# Altium PCB PCB1.PcbDoc
Units mil, origin at the board's own origin, x right, y up, seen from the top; angles counter-clockwise.
Board outline 1985 x 950 mil, 2 copper layers (Top Layer, Bottom Layer); 27 components, 18 nets, 88 pads, 16 vias.
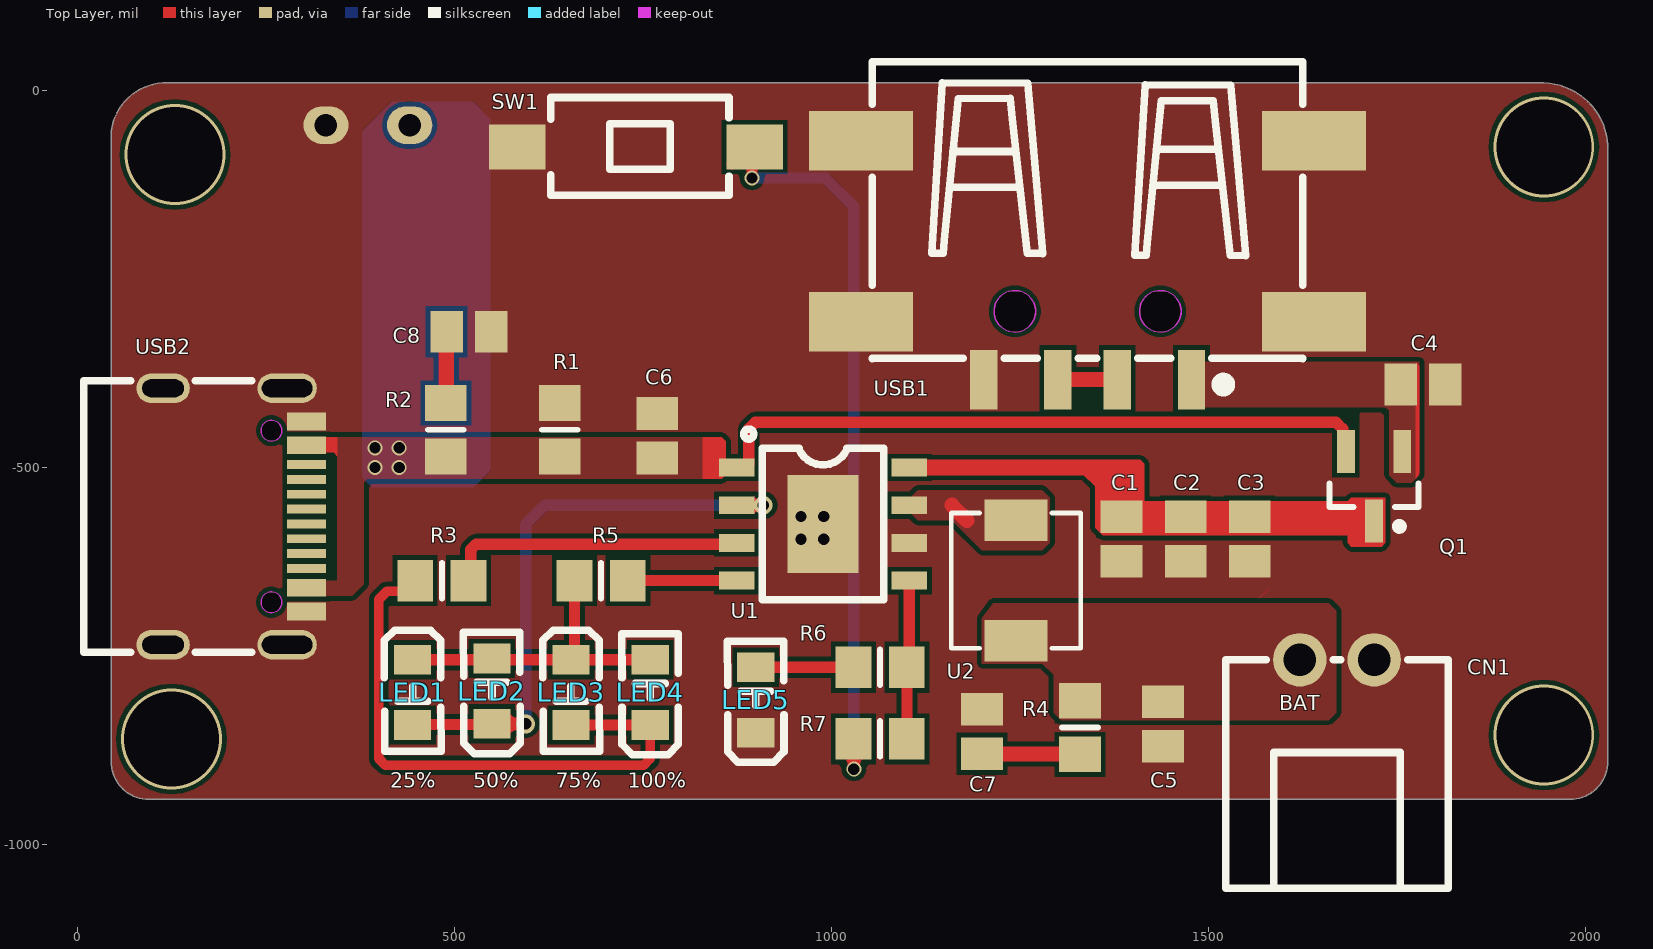
[diagram p0: Top Layer view]
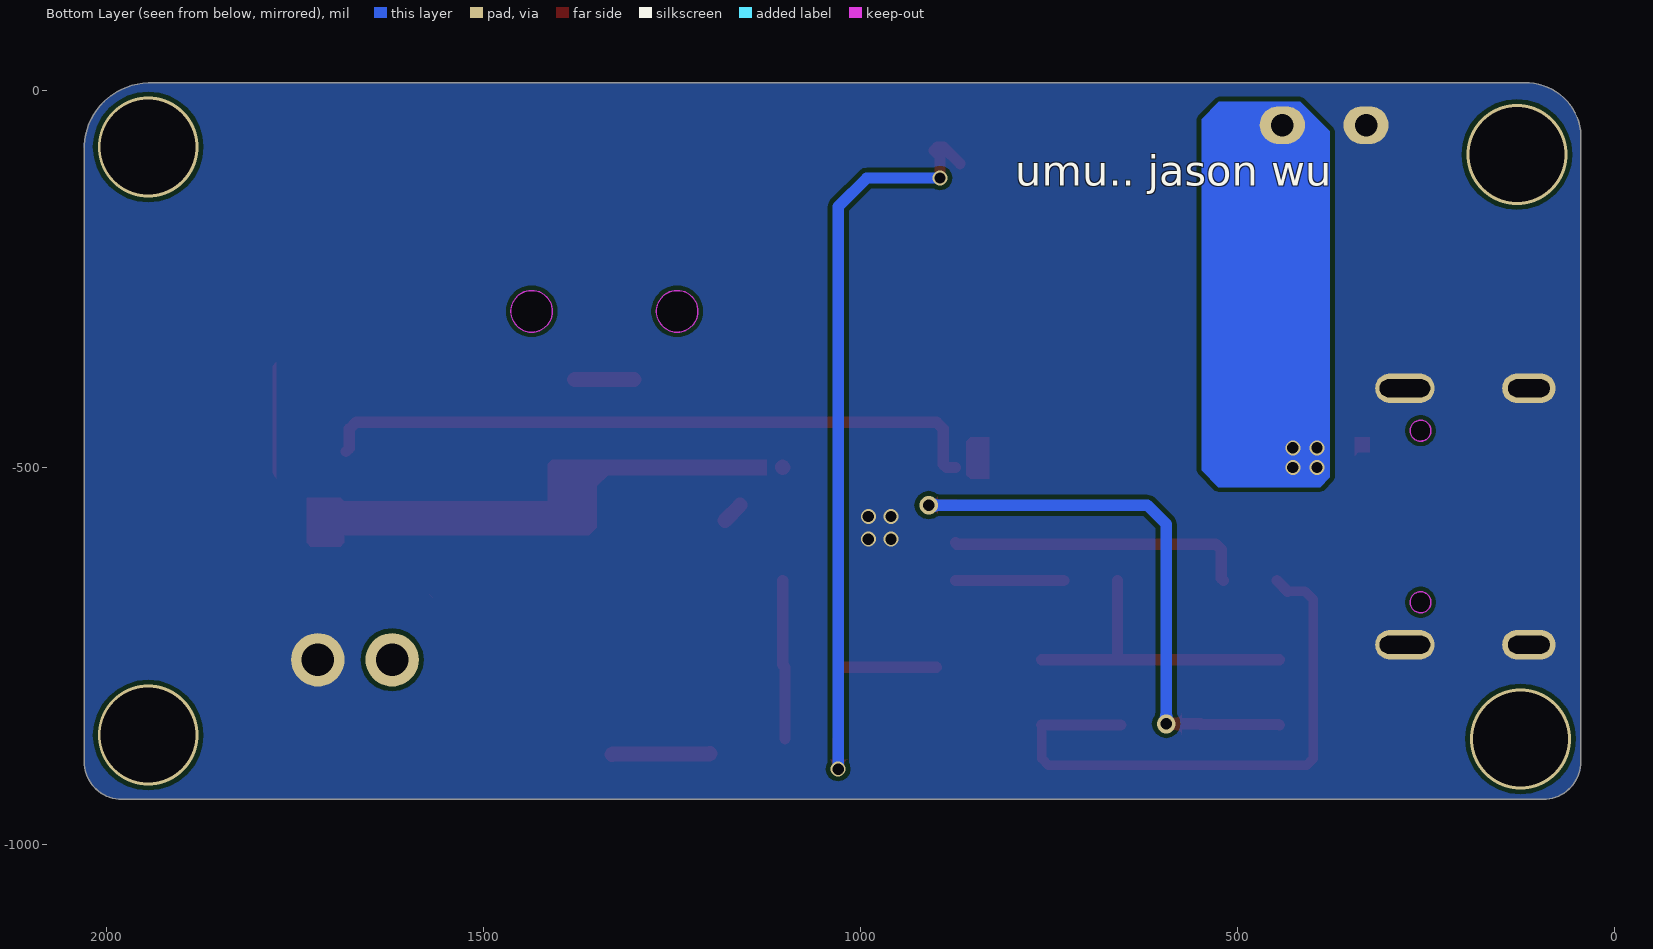
[diagram p1: Bottom Layer view, seen from below]

## Layer stack, top to bottom
Top Solder: solder mask 0.4, Solder Resist, Dk 3.5
Top Layer: signal copper 1.4
Dielectric 1: dielectric 12.6, FR-4, Dk 4.8
Bottom Layer: signal copper 1.4
Bottom Solder: solder mask 0.4, Solder Resist, Dk 3.5

## Board outline
95,-940 cw(c95,-890) 45,-890 45,-60 cw(c117.5,-62.5) 120,10 1945,10 cw(c1942.5,-77.5) 2030,-80 2030,-890 cw(c1980,-890) 1980,-940

## Design rules (kind name [scope] priority, off if disabled: settings)
Clearance [All] p1: gap=6 ignorepadtopadclearanceinfootprint=FALSE
HoleSize [All] p1: absolutevalues=TRUE maxlimit=200 minlimit=1 maxpercent=80.000 minpercent=20.000
MinimumSolderMaskSliver [All] p1: minsoldermaskwidth=3.5
PlaneConnect [All] p1: planeconnectstyle=Direct reliefexpansion=20 reliefentries=4 reliefconductorwidth=10 reliefairgap=10
PolygonConnect [All] p1: connectstyle=Direct reliefconductorwidth=10 reliefentries=4 polygonreliefangle="90 Angle" airgapwidth=10
RoutingVias [All] p1: holewidth=28 width=50 viastyle="Through Hole" minholewidth=28 minwidth=50 maxholewidth=28 maxwidth=50
SilkToSolderMaskClearance [IsPad] p1: minsilkscreentomaskgap=2.99 clearancetoexposedcopper=TRUE
SolderMaskExpansion [All] p1: expansion=4 istentingtop=FALSE
Width [All] p1: maxlimit=50 minlimit=10 preferedwidth=10 minimp=50.000000 maximp=50.000000 favimp=50.000000
26 further rules are at their usual default settings.

## Components (designator, comment, footprint, x,y, rotation, side; value= is the part's Value field where it differs from the comment)
C1 "Capacitor_Patch" C0805 1385,-595 r270 top value=10uF
C2 "Capacitor_Patch" C0805 1470,-595 r270 top value=10uF
C3 "Capacitor_Patch" C0805 1555,-595 r270 top value=10uF
C4 "Capacitor_Patch" C0805 1785,-390 r0 top value=10uF
C5 "Capacitor_Patch" C0805 1440,-840 r90 top value=10uF
C6 "Capacitor_Patch" C0805 769.06,-457.87 r270 top value=10uF
C7 "Capacitor_Patch" C0805 1200,-850 r270 top value=10uF
C8 "Capacitor_Patch" C0805 519.53,-320 r180 top value=10uF
CN1 "HX25003-2WAP" CONN-TH_2P-P2.50_HX25003-2WAP 1670.79,-755 r0 top
LED1 "LED_Patch" PCBComponent_1 462.59,-280.63 r270 top
LED2 "LED_Patch" PCBComponent_1 532.41,-1314.37 r90 top
LED3 "LED_Patch" PCBComponent_1 672.59,-280.63 r270 top
LED4 "LED_Patch" PCBComponent_1 742.41,-1315.99 r90 top
LED5 "LED_Patch" PCBComponent_1 882.41,-1325.99 r90 top
Q1 "MOSFET-P" SOT23_M 1720,-525 r270 top
R1 "Res" 6-0805_N 640,-450 r270 top
R2 "Res" 6-0805_N 489.06,-450 r90 top
R3 "Res" 6-0805_N 483.62,-650 r0 top
R4 "Res" 6-0805_N 1330,-845 r270 top
R5 "Res" 6-0805_N 695,-650 r0 top
R6 "Res" 6-0805_N 1065,-765 r180 top
R7 "Res" 6-0805_N 1065,-860 r180 top
SW1 "TS-1101-C-W" SW-SMD_L6.0-W3.3-LS8.0 741,-75 r180 top
U1 "IP5306" ESOP-8_L4.9-W3.9-P1.27-LS6.0-BL-EP 989.06,-575 r270 top locked
U2 "1uH" IND-SMD_L4.4-W4.2 1245,-650 r90 top
USB1 "10.0 QTJ6.3" USB-A-SMD_10.0-QTJ6.3 1340,-225 r180 top
USB2 "KH-TYPE-C-16P" USB-C-SMD_KH-TYPE-C-16P 209.06,-565 r270 top

## Footprints (in the part's own frame and the unit in brackets; to place one, negate y for a bottom-side part, rotate by r counter-clockwise, add the part's x,y. Pads: shape width x height; smd on the part's side, far side on the other; paste and mask are expansions set on the pad)
6-0805_N [mm] "Chip Resistor, Body 2.0x1.2mm, IPC Medium Density"
  rect 1.2x1.4 smd: 1(-0.9,0) 2(0.9,0)
  silkscreen extent 0,-0.6 0,0.6, body extent -1.07,-0.7 1.07,0.7, height 0.7
C0805 [mm] "Chip Capacitor, Body 2.0x1.3mm, IPC High Density"
  rect 1.1x1.4 smd: 1(-0.75,0) 2(0.75,0)
  body extent -1.1,-0.72 1.1,0.72, height 1.4
CONN-TH_2P-P2.50_HX25003-2WAP [mm]
  round 1.8 hole 1.1: 1(-1.25,0) 2(1.25,0)
  silkscreen extent -3.75,-7.7 3.75,0
ESOP-8_L4.9-W3.9-P1.27-LS6.0-BL-EP [mm]
  rect 0.6x1.2 smd: 1(-1.905,-2.908) 2(-0.635,-2.908) 3(0.635,-2.908) 4(1.905,-2.908) 5(1.905,2.908) 6(0.635,2.908) 7(-0.635,2.908) 8(-1.905,2.908)
  rect 3.3x2.4 smd: 9(0,0)
  silkscreen extent -3.2,-2.67 2.55,2.05
IND-SMD_L4.4-W4.2 [mm]
  rect 1.4x2.12 smd: 1(2.028,0) 2(-2.028,0)
  silkscreen extent -2.28,-2.18 2.28,2.18
PCBComponent_1 [mm]
  rect 1x1.25 smd: 1(12.049,-0.447) 2(14.249,-0.447)
  silkscreen extent 11.05,-1.4 15.13,0.51
SOT23_M [mm] "SOT23, 3-Leads, Body 2.9x1.3mm, Pitch 0.95mm, Lead Span 2.3mm - Reverse Pinning, IPC Low Density"
  rect 1.45x0.6 smd: 1(1.175,0) 2(-1.175,-0.95) 3(-1.175,0.95)
  silkscreen extent -0.1,-1.5 1.47,1.5, body extent -0.7,-1.5 0.7,1.5, height 1.1
SW-SMD_L6.0-W3.3-LS8.0 [mm]
  rect 1.9x1.5 smd: 1(-4,0) 2(4,0)
  silkscreen extent -3.14,-1.67 2.86,1.63
USB-A-SMD_10.0-QTJ6.3 [mm]
  rect 0.92x2 smd: 1(-3.5,4.025) 2(-1,4.025) 3(1,4.025) 4(3.5,4.025)
  rect 3.5x2 smd: 5(7.625,2.075) 6(7.625,-4.025) 7(-7.625,-4.025) 8(-7.625,2.075)
  Keep-Out Layer board cut-out: -1.75,1.724 -1.75,1.632 -1.798,1.454 -1.89,1.294 -2.02,1.164 -2.18,1.072 -2.358,1.024 -2.542,1.024 -2.72,1.072 -2.88,1.164 -3.01,1.294 -3.102,1.454 -3.15,1.632 -3.15,1.724 -3.15,1.816 -3.102,1.994 -3.01,2.154 -2.88,2.284 -2.72,2.376 -2.542,2.424 -2.358,2.424 -2.18,2.376 -2.02,2.284 -1.89,2.154 -1.798,1.994 -1.75,1.816 -1.75,1.724 -1.75,1.724
  Keep-Out Layer board cut-out: 3.15,1.724 3.15,1.632 3.102,1.454 3.01,1.294 2.88,1.164 2.72,1.072 2.542,1.024 2.358,1.024 2.18,1.072 2.02,1.164 1.89,1.294 1.798,1.454 1.75,1.632 1.75,1.724 1.75,1.816 1.798,1.994 1.89,2.154 2.02,2.284 2.18,2.376 2.358,2.424 2.542,2.424 2.72,2.376 2.88,2.284 3.01,2.154 3.102,1.994 3.15,1.816 3.15,1.724 3.15,1.724
  Keep-Out Layer circle w0.025: c-2.45,1.724 r0.7
  Keep-Out Layer circle w0.025: c2.45,1.724 r0.7
  Keep-Out Layer region: -1.75,1.724 -1.75,1.632 -1.798,1.454 -1.89,1.294 -2.02,1.164 -2.18,1.072 -2.358,1.024 -2.542,1.024 -2.72,1.072 -2.88,1.164 -3.01,1.294 -3.102,1.454 -3.15,1.632 -3.15,1.724 -3.15,1.816 -3.102,1.994 -3.01,2.154 -2.88,2.284 -2.72,2.376 -2.542,2.424 -2.358,2.424 -2.18,2.376 -2.02,2.284 -1.89,2.154 -1.798,1.994 -1.75,1.816 -1.75,1.724 -1.75,1.724
  Keep-Out Layer region: 3.15,1.724 3.15,1.632 3.102,1.454 3.01,1.294 2.88,1.164 2.72,1.072 2.542,1.024 2.358,1.024 2.18,1.072 2.02,1.164 1.89,1.294 1.798,1.454 1.75,1.632 1.75,1.724 1.75,1.816 1.798,1.994 1.89,2.154 2.02,2.284 2.18,2.376 2.358,2.424 2.542,2.424 2.72,2.376 2.88,2.284 3.01,2.154 3.102,1.994 3.15,1.816 3.15,1.724 3.15,1.724
  silkscreen extent -7.25,-6.67 7.25,4.39
USB-C-SMD_KH-TYPE-C-16P [mm]
  oval 1x2 hole 0.6 slot 1.7 at 90 deg: 1(-4.32,1.765) 2(4.32,1.765)
  oval 1x1.8 hole 0.6 slot 1.4 at 90 deg: 3(-4.32,-2.415) 4(4.32,-2.415)
  rect 0.3x1.3 smd paste-100 mask+0.05: A1(-3.35,2.415) A4(-2.55,2.415) A5(-1.25,2.415) A6(-0.25,2.415) A7(0.25,2.415) A8(1.25,2.415) A9(2.55,2.415) A12(3.35,2.415) B1(3.05,2.415) B4(2.25,2.415) B5(1.75,2.415) B6(0.75,2.415) B7(-0.75,2.415) B8(-1.75,2.415) B9(-2.25,2.415) B12(-3.05,2.415)
  Keep-Out Layer board cut-out: -2.54,1.235 -2.54,1.165 -2.593,1.037 -2.692,0.938 -2.82,0.885 -2.96,0.885 -3.088,0.938 -3.187,1.037 -3.24,1.165 -3.24,1.235 -3.24,1.305 -3.187,1.433 -3.088,1.532 -2.96,1.585 -2.82,1.585 -2.692,1.532 -2.593,1.433 -2.54,1.305 -2.54,1.235 -2.54,1.235
  Keep-Out Layer board cut-out: 3.24,1.235 3.24,1.165 3.187,1.037 3.088,0.938 2.96,0.885 2.82,0.885 2.692,0.938 2.593,1.037 2.54,1.165 2.54,1.235 2.54,1.305 2.593,1.433 2.692,1.532 2.82,1.585 2.96,1.585 3.088,1.532 3.187,1.433 3.24,1.305 3.24,1.235 3.24,1.235
  Keep-Out Layer circle w0.025: c-2.89,1.235 r0.35
  Keep-Out Layer circle w0.025: c2.89,1.235 r0.35
  Keep-Out Layer region: -2.54,1.235 -2.54,1.165 -2.593,1.037 -2.692,0.938 -2.82,0.885 -2.96,0.885 -3.088,0.938 -3.187,1.037 -3.24,1.165 -3.24,1.235 -3.24,1.305 -3.187,1.433 -3.088,1.532 -2.96,1.585 -2.82,1.585 -2.692,1.532 -2.593,1.433 -2.54,1.305 -2.54,1.235 -2.54,1.235
  Keep-Out Layer region: 3.24,1.235 3.24,1.165 3.187,1.037 3.088,0.938 2.96,0.885 2.82,0.885 2.692,0.938 2.593,1.037 2.54,1.165 2.54,1.235 2.54,1.305 2.593,1.433 2.692,1.532 2.82,1.585 2.96,1.585 3.088,1.532 3.187,1.433 3.24,1.305 3.24,1.235 3.24,1.235
  silkscreen extent -4.57,-5.08 4.57,0.57

## Part data
C1 C2 C3 C4 C5 C6 C7 C8: "0805", JLCPCB Part Class="Basic Part", LCSC Part Name="10uF ±10% 25V", Manufacturer=SAMSUNG(三星), Manufacturer Part=CL21A106KAYNNNE, Temperature Coefficient=X5R, Tolerance=±10%, Voltage Rated=25V, Add into BOM=yes, Convert to PCB=yes, Datasheet=https://atta.szlcsc.com/upload/public/pdf/source/20160218/1457707763339.pdf, Device=CL21A106KAYNNNE_C15850, Supplier=LCSC, Supplier Footprint=0805, Supplier Part=C15850, Symbol=CL21A106KAYNNNE
CN1: Current Rating (Max)=-, JLCPCB Part Class="Extended Part", LCSC Part Name="1x2P 间距:2.5mm 弯插 系列:XH", Manufacturer=HX(红星), Add into BOM=yes, Convert to PCB=yes, Datasheet=https://atta.szlcsc.com/upload/public/pdf/source/20191028/C442341_CB026E8ECE589085FA4A025D9CD8B44B.pdf, Device=HX25003-2WAP, Manufacturer Part=HX25003-2WAP, Mounting Style=弯插, Number of Pins=2P, Number of PINs Per Row=2, Number of Rows=1, Operating Temperature Range=-, Pins Structure=1x2P, Pitch=2.5mm, Reference Series=XH, Row Spacing=-, Supplier=LCSC, Supplier Footprint=弯插,P=2.5mm, Supplier Part=C442326, Symbol=HX25003-2WAP
LED1 LED2 LED3 LED4 LED5: "0805", Color Temperature=-, Forward Current=20mA, Illumination Color=翠绿色, JLCPCB Part Class="Extended Part", LCSC Part Name=XL-2012UGC, Lens Color=无色透明透镜, Manufacturer=XINGLIGHT(成兴光), Operating Temperature=-20℃~+85℃, Power(Watts)=70mW, Voltage - Forward(Vf)=3.2V, Add into BOM=yes, Convert to PCB=yes, Datasheet=https://atta.szlcsc.com/upload/public/pdf/source/20250225/603248BA8F596867ADF5B11D7DFBCB79.pdf, Device=XL-2012UGC, Luminous Intensity=750mcd, Manufacturer Part=XL-2012UGC, Mounting Sytle=正贴, Peak Wavelength=525nm, Supplier=LCSC, Supplier Footprint=0805, Supplier Part=C965815, Symbol=XL-2012UGC, Viewing Angle=120°, Wavelength - Dominant=515nm~535nm
Q1: "P-Channel MOSFET", LatestRevisionDate=17-Jul-2002, LatestRevisionNote="Re-released for DXP Platform.", PackageDescription="TO, Flat Index; 3 In-Line, Axial Leads; Body Dia. 4.6mm; Lead Dia. 0.5 mm (max)", PackageReference=E3, PackageVersion=1995/1996, Published=8-Jun-2000, Publisher="Altium Limited"
SW1: Actuator/Cap Color=白色带淡绿, Contact Current=50mA, Insulation Resistance=-, JLCPCB Part Class="Extended Part", LCSC Part Name="6*3.6*2.5mm 立贴 轻触开关", Manufacturer="XKB Connectivity(中国星坤)", Operating Force=260gf, Operating Temperature=-30℃~+85℃, Voltage Rating (DC)=12V, Actuator Style=矩形按钮, Add into BOM=yes, Circuit=单刀单掷, Convert to PCB=yes, Datasheet=https://atta.szlcsc.com/upload/public/pdf/source/20200227/C318938_C2E53B1EEDE37D980A33616AC086DE53.pdf, Device=TS-1101-C-W, IP Rating=-, Manufacturer Part=TS-1101-C-W, Mechanical Life=5万次, Mounting Style=立贴, Pin Style=-, Power Rating=-, Strike Gundam=不带, Supplier=LCSC, Supplier Footprint=SMD, Supplier Part=C318938, Switch Height=2.5mm, Switch Length=6mm, Switch Width=3.6mm, Symbol=TS-1101-C-W, Voltage Rating (AC)=-, With Lamp=无
U1: "IC"
U2: library part Inductor_SMD, Current - Saturation(Isat)=7A, Current Rating=6A, DC Resistance(DCR)=27mΩ, JLCPCB Part Class="Extended Part", LCSC Part Name="1uH ±20% 7A", Manufacturer=XR(祥如), Manufacturer Part=XR0420-1R0M, Tolerance=±20%, Add into BOM=yes, Convert to PCB=yes, Datasheet=https://atta.szlcsc.com/upload/public/pdf/source/20240328/238362994E593F0E82794C6287AEB16E.pdf, Device=XR0420-1R0M, Supplier=LCSC, Supplier Footprint=SMD,0420, Supplier Part=C5307587, Symbol=XR0420-1R0M, Type=一体成型电感
USB1: Core Colour=黑色, Current Rating - Power (Max)=1.5A, JLCPCB Part Class="Extended Part", LCSC Part Name="Type-A 母 卧贴", Manufacturer="SHOU HAN(首韩)", Operating Temperature Range=-25℃~+85℃, Rated Voltage (Max)=30V, Add into BOM=yes, Center Height=-, Connect-Disconnect Life=5千次, Connector Type=Type-A, Convert to PCB=yes, Datasheet=https://atta.szlcsc.com/upload/public/pdf/source/20241125/0CEA21D77C128715D5877707589FFAD8.pdf, Device="10.0 QTJ6.3", Gender=母, Length=10mm, Manufacturer Part="10.0 QTJ6.3", Mounting Style=卧贴, Number of Contacts=4P, Number of Ports=1, Standard="USB 2.0", Supplementary Features=-, Supplier=LCSC, Supplier Footprint=SMD, Supplier Part=C404966, Symbol="10.0 QTJ6.3"
USB2: Current Rating - Power (Max)=3A, JLCPCB Part Class="Extended Part", LCSC Part Name="Type-C 母 卧贴", Manufacturer=kinghelm(金航标), Operating Temperature Range=-40℃~+85℃, Add into BOM=yes, Connector Type=Type-C, Convert to PCB=yes, Datasheet=https://atta.szlcsc.com/upload/public/pdf/source/20200911/C709357_AA8DCEB38BB20E3035A7ED7AE7667837.pdf, Device=KH-TYPE-C-16P, Gender=母, Manufacturer Part=KH-TYPE-C-16P, Mounting Style=卧贴, Number of Contacts=16P, Number of Ports=1, Standard=-, Supplier=LCSC, Supplier Footprint=SMD, Supplier Part=C709357, Symbol=KH-TYPE-C-16P
R1 R2 R3 R4 R5 R6 R7: Code_IPC=RESC2012, LatestRevisionDate=29-May-2009, LatestRevisionNote="IPC-7351 Footprint Added.", PackageDescription="Chip Resistor 0805 Case Size", PackageReference=6-0805, PackageVersion=Mar-2003, Published=24-Mar-1999, Publisher="Altium Limited"

## Free pads (board coordinates)
  oval 60x50 hole 29.76: 2(330,-46) 3(441,-46)

## Via types
v1: diameter 20, hole 15, Top Layer to Bottom Layer, 10 vias
v2: diameter 133.86, hole 125.98, Top Layer to Bottom Layer, 4 vias
v3: diameter 25, hole 15, Top Layer to Bottom Layer, 2 vias

## Nets (pads, with @x,y where several pads share a name; then routed paths per layer and width w, separated by ;. In a path a pad name is that pad's centre, name@x,y a point inside that pad or via, vN(x,y) a via of type N, cw(c..) or ccw(c..) an arc to the next point about the centre after c; other vN are vias at no path point)
BAT: C5.2 CN1.1 R4.1 U2.2
GND: C1.2 C2.2 C3.2 C4.2 C5.1 C6.1 C7.1 C8.1 CN1.2 LED5.1 pad.2 R1.1 SW1.2 U1.6 U1.9 USB1.4 USB1.5 USB1.6 USB1.7 USB1.8 USB2.1 USB2.2 USB2.3 USB2.4 USB2.A1 USB2.A12 USB2.B1 USB2.B12
  other v1: 960,-595 990,-595 960,-565 990,-565
NetC1_1: C1.1 C2.1 C3.1 Q1.1 U1.8 | length 178.6
  Top Layer w15: C1.1 C2.1 C3.1 ; Q1.1@1715.69,-565.47 1720,-569.78 Q1.1
  Top Layer w20: U1.8 U1.8@1104.04,-499.51 ; C2.1@1470,-570.47 C2.1@1470.24,-570.24
NetC4_1: C4.1 Q1.3 USB1.1
NetC7_2: C7.2 R4.2 | length 130.4
  Top Layer w20: C7.2 1200.45,-879.98 1329.55,-879.98 R4.2
NetC8_2: C8.2 R2.2 | length 95
  Top Layer w20: R2.2 489.53,-414.09 489.53,-320.47 C8.2
NetLED1_1: LED1.1 LED2.2 LED3.1 LED4.2 R5.1 | length 421.9
  Top Layer w15: LED1.1 LED3.1 ; R5.1 659.57,-750.43 LED3.1 ; LED4.2 LED3.1
NetLED1_2: LED1.2 LED2.1 U1.2 | length 776.5
  Top Layer w15: LED1.2 445.81,-840.81 549.19,-840.81 LED2.1 v3(595,-840) ; U1.2 v3(910,-550)
  Bottom Layer w15: v3(595,-840) 595,-575 620,-550 v3(910,-550)
NetLED3_2: LED3.2 LED4.1 R3.1 | length 786.6
  Top Layer w13: R3.1@434.04,-664.15 410.85,-664.15 400,-675 400,-886.21 408.79,-895 751.21,-895 760,-886.21 LED4.1
  Top Layer w15: R3.1@434.04,-664.15 R3.1 ; LED3.2 LED4.1
NetLED5_2: LED5.2 R6.2 | length 129.6
  Top Layer w15: LED5.2 R6.2
NetR3_2: R3.2 U1.3 | length 398.6
  Top Layer w15: R3.2 522.06,-646.99 522.06,-608.73 529.11,-601.68 872.88,-601.68 U1.3
NetR5_2: R5.2 U1.4 | length 144.1
  Top Layer w15: R5.2 U1.4
NetR6_1: R6.1 R7.1 U1.5 | length 211.3
  Top Layer w15: R7.1 R6.1 1103.56,-761.88 U1.5
NetR7_2: R7.2 SW1.1 | length 1022.1
  Top Layer w15: SW1.1@868.58,-97.03 890.61,-75 SW1.1 903,-79.52 895,-87.52 v1(895,-116) ; R7.2 1030,-860.43 v1(1030,-900)
  Bottom Layer w15: v1(895,-116) 992,-116 1030,-154 v1(1030,-900)
NetU1_7: U1.7 U2.1 | length 28.5
  Top Layer w20: 1160,-550 1180.16,-570.16
NetUSB1_2: USB1.2 USB1.3 | length 78.7
  Top Layer w20: USB1.3 USB1.2
NetUSB2_A4: 
VIN: C6.2 pad.3 Q1.2 R1.2 R2.1 U1.1 USB2.A4 USB2.A9 USB2.B4 USB2.B9 | length 891.4
  Top Layer w15: U1.1 886.37,-500 890.68,-495.69 890.68,-448.79 899.46,-440 1669.5,-440 1678.29,-448.79 1678.29,-474.43 Q1.2
  other v1: 395,-500 427,-500 395,-474 427,-474
pads on no net: USB2.A5 USB2.A6 USB2.A7 USB2.A8 USB2.B5 USB2.B6 USB2.B7 USB2.B8
copper on no net:
  other v2: 125,-860 1945,-855 130,-85 1945,-75

## Polygon pours and split planes (outlines as drawn)
GND on Top Layer "Top Layer-No Net" (solid, pour order 33): 95,-940 cw(c95,-890) 45,-890 45,-60 cw(c117.5,-62.5) 120,10 1945,10 cw(c1942.5,-77.5) 2030,-80 2030,-890 cw(c1980,-890) 1980,-940
NetC4_1 on Top Layer "NETC4_1_L01_P030" (solid, pour order 30): 1750,-520 1770,-520 1780,-510 1780,-360 1460,-360 1460,-420 1735,-420 1740,-425 1740,-510
BAT on Top Layer "BAT_L01_P027" (solid, pour order 27): 1640,-680 1660,-680 1670,-690 1670,-825 1660,-835 1640,-835
BAT on Top Layer "BAT_L01_P025" (solid, pour order 25): 1200,-760 1280,-760 1295,-775 1295,-825 1305,-835 1640,-835 1640,-680 1570,-680 1215,-680 1200,-700
VIN on Top Layer "VIN_L01_P021" (solid, pour order 21): 310,-670 365,-670 380,-655 380,-520 385,-515 395,-515 830,-515 830,-460 345,-460 345,-650 310,-650
NetU1_7 on Top Layer "NETU1_7_L01_P018" (solid, remove dead copper, pour order 18): 1105,-540 1115,-530 1280,-530 1290,-540 1290,-600 1280,-610 1200,-610 1160,-570 1115,-570 1105,-560
GND on Bottom Layer "Top Layer-No Net1" (solid, pour order 34): 95,-940 cw(c95,-890) 45,-890 45,-60 cw(c117.5,-62.5) 120,10 1945,10 cw(c1942.5,-77.5) 2030,-80 2030,-890 cw(c1980,-890) 1980,-940

## Other copper
Top Layer:
  pour cut-out: 1700.41,-444.2 1700.41,-428.59 1702.51,-426.49 1682.27,-426.49 1682.27,-426.52 1680.46,-428.33 1680.46,-433.52 1691.14,-444.2
  pour cut-out: 1682.27,-426.49
  pour cut-out: 1700.41,-444.2
  region net NetC1_1: 1685,-545 1690,-540 1735,-540 1735,-600 1730,-605 1690,-605 1685,-600
  region net NetC1_1: 1685,-545
  region net GND: 1335,-600
  region net GND: 1345,-600
  region net GND: 1335,-590
  region net GND: 1567.31,-673.51 1580.01,-660.8
  region net GND: 1422.56,-596.49
  region net GND: 1345,-600
  region net NetC1_1: 1415,-545 1415,-495 1410,-490 1335,-490
  region net NetC1_1: 1685,-590 1360,-590 1350,-580 1350,-525 1335,-510 1125,-510 1125,-490 1335,-490 1405,-535 1415,-545 1685,-545
  region net VIN: 860,-487.5
  region net VIN: 830,-515 855,-515 860,-510 860,-465 855,-460 830,-460
  region net NetC4_1: 1775,-360 1780,-365 1780,-507.5 1775,-515
  region net NetC4_1: 1775,-360
  region net VIN: 867.5,-487.5
  region net VIN: 325,-460 345,-460 345,-485 340,-480 325,-480
Bottom Layer:
  region net VIN: 391,-526 526,-526 548,-504 548,-38 525,-15 417,-15 378,-54 378,-513
  region: 1735,-600

## Silkscreen, mask and mechanical layers (free items; w line width, h text height)
Top Overlay:
  text "BAT" at 1594,-822 h20
  text "25%" at 415,-925 h20
  text "50%" at 525,-925 h20
  text "75%" at 635,-925 h20
  text "100%" at 730,-925 h20
Bottom Overlay:
  text "umu.. jason wu" at 795,-126.67 h40
Mechanical 1:
  lines w10: 45,-890 ccw(c95,-890) 95,-940 1980,-940 ccw(c1980,-890) 2030,-890 2030,-80 ccw(c1942.5,-77.5) 1945,10 1467.63,10 611.86,10 414.79,10 120,10 ccw(c117.5,-62.5) 45,-60 45,-890